# EAGLE board projeson (EAGLE 6.3)

Size 100 x 80 mm. Coordinates in mm from the lower left corner, seen from the top.
Outline: 0,0 100,0 100,80 0,80 0,0
Copper layers (1*16): Top 0.035mm / dielectric 1.5mm / Bottom 0.035mm
Design rules "default": minimum track width 10mil, minimum drill 24mil, track to track 8mil, track to pad 8mil, pad to pad 8mil, via to via 8mil, smd to smd 8mil, copper to edge 40mil, drill to drill 8mil, minimum pad ring 10mil, minimum via ring 8mil, stop-mask expansion 4mil, vias tented up to drill 0mil, thermal gap 10mil

## Footprints (pad centres in the part's own frame; a part is rotated, then mirrored left to right if it is on the bottom)
78XXS = drill 1.016 pad 1.93 square: GND 0,-5.08; IN -2.54,-2.54; OUT 2.54,-2.54
RB1A = drill 1.016 pad 1.676 square: + -2.54,2.54; - 2.54,-2.54; AC1 2.54,2.54; AC2 -2.54,-2.54
E3,5-10 = drill 0.813 pad 1.676 square: + -1.778,0; - 1.778,0
E2,5-7 = drill 0.813 pad 1.6 square: + -1.27,0; - 1.27,0
C050-025X075 = drill 0.813 square: 1 -2.54,0; 2 2.54,0
DIL28-3 = drill 0.813 long: 1 -16.51,-3.81; 2 -13.97,-3.81; 3 -11.43,-3.81; 4 -8.89,-3.81; 5 -6.35,-3.81; 6 -3.81,-3.81; 7 -1.27,-3.81; 8 1.27,-3.81; 9 3.81,-3.81; 10 6.35,-3.81; 11 8.89,-3.81; 12 11.43,-3.81; 13 13.97,-3.81; 14 16.51,-3.81; 15 16.51,3.81; 16 13.97,3.81; 17 11.43,3.81; 18 8.89,3.81; 19 6.35,3.81; 20 3.81,3.81; 21 1.27,3.81; 22 -1.27,3.81; 23 -3.81,3.81; 24 -6.35,3.81; 25 -8.89,3.81; 26 -11.43,3.81; 27 -13.97,3.81; 28 -16.51,3.81
317L = drill 0.813 pad 1.422 square: 1 -1.27,0; 2 0,1.905; 3 1.27,0
1X08 = drill 1.016 long: 1 -8.89,0; 2 -6.35,0; 3 -3.81,0; 4 -1.27,0; 5 1.27,0; 6 3.81,0; 7 6.35,0; 8 8.89,0
HY-1602F = drill 1 pad 1.93 long: 1 2.54,0; 2 5.08,0; 3 7.62,0; 4 10.16,0; 5 12.7,0; 6 15.24,0; 7 17.78,0; 8 20.32,0; 9 22.86,0; 10 25.4,0; 11 27.94,0; 12 30.48,0; 13 33.02,0; 14 35.56,0; 15 38.1,0; 16 40.64,0 | hole 2.5: -2.96,0; 72.04,0; -2.96,-31; 72.04,-31
AC04 = drill 1.1 pad 2: 1 -12.7,0; 2 12.7,0
0207/10 = drill 0.813 pad 1.422 square: 1 -5.08,0; 2 5.08,0
E3031TRF = drill 1.016 pad 2.54 square: P$1 -10,-10; P$5 10,-10; P$7 5,10; P$9 -5,10
UTR-C12-M = drill 1.016 pad 1.676 square: 1 -17.188,4.333; 2 -17.188,1.796; 3 -17.188,-0.739; 4 20.912,9.421; 5 20.912,6.878; 6 20.912,4.341; 7 20.912,1.801; 8 20.912,-0.742; 9 20.912,-3.282; 10 20.912,-5.817; 11 20.916,-8.358
RG58_RF_CON = drill 1.676 pad 3.048 square: GND 0,7.62; RF 0,3.81 | hole 2.997: -2.54,0; 2.54,0
AK300/3 = drill 1.321 long: 1 -5.004,0; 2 0,0; 3 5.004,0

## Placement (x,y rotation side)
7805  [78XXS]  -74.93,106.68 0 top  (outside the outline)
B1  RB156 KOpru Diyot  [RB1A]  -100.33,76.2 0 top  (outside the outline)
C2  470UF 35V  [E3,5-10]  -81.28,76.2 0 top  (outside the outline)
C3  22uf 16V  [E2,5-7]  -91.44,104.14 0 top  (outside the outline)
C4  100n  [C050-025X075]  -16.51,111.76 0 top  (outside the outline)
C9  10uf 35V  [E2,5-7]  -106.68,104.14 0 top  (outside the outline)
C10  220n  [C050-025X075]  -25.4,111.76 0 top  (outside the outline)
C16  100n  [C050-025X075]  -34.29,111.76 0 top  (outside the outline)
IC1  PIC16876P  [DIL28-3]  -31.75,76.2 0 top  (outside the outline)
IC2  LM317L  [317L]  -71.12,110.49 0 top  (outside the outline)
JP1  [1X08]  -49.53,110.49 0 top  (outside the outline)
LCD1  LCD_2X16_SIL  [HY-1602F]  -88.9,35.56 0 top  (outside the outline)
R1  220  [AC04]  -26.67,85.09 0 top  (outside the outline)
R2  220  [AC04]  -54.61,85.09 0 top  (outside the outline)
R3  220  [AC04]  -82.55,85.09 0 top  (outside the outline)
R4  220  [AC04]  -26.67,93.98 0 top  (outside the outline)
R5  220  [AC04]  -54.61,93.98 0 top  (outside the outline)
R6  220  [AC04]  -82.55,93.98 0 top  (outside the outline)
R7  220  [AC04]  -26.67,102.87 0 top  (outside the outline)
R8  220  [AC04]  -54.61,102.87 0 top  (outside the outline)
R9  470R  [0207/10]  -80.01,110.49 0 top  (outside the outline)
R10  330R  [0207/10]  -92.71,110.49 0 top  (outside the outline)
TRAFO  12V  [E3031TRF]  -72.39,54.61 0 top  (outside the outline)
U$1  UTR-C12-M  [UTR-C12-M]  -36.83,54.61 0 top  (outside the outline)
U$2  RG58_RF_CON  [RG58_RF_CON]  -69.85,72.39 0 top  (outside the outline)
X1  [AK300/3]  -97.79,46.99 0 top  (outside the outline)

## Library data of the parts
7805 IC2 = v-reg
B1 = rectifier
C2-C4 C9 C10 C16 R9 R10 = rcl
IC1 = microchip; OC_FARNELL: unknown; OC_NEWARK: unknown
JP1 = pinhead
LCD1 = lcd_2x16_led_backlight
R1-R8 = resistor-power; OC_FARNELL: unknown; OC_NEWARK: unknown
TRAFO = UDEA3
U$1 U$2 = UDEA_HAKKI
X1 = con-ptr500; OC_FARNELL: unknown; OC_NEWARK: unknown

## Nets
GND: 7805.GND B1.- C2.- C3.- C4.2 C16.2 IC1.8 IC1.19 U$1.3 U$1.4
N$1: R1.1
N$2: R2.1
N$3: R3.1 U$1.9
N$4: U$1.10
N$5: R1.2
N$9: IC1.28 LCD1.4
N$10: R5.2
N$11: R6.2
N$12: IC1.11 R7.2
N$13: R8.2
N$14: IC1.13
N$17: IC1.16
N$18: IC1.27 LCD1.5
N$19: IC1.26 LCD1.6
N$20: IC1.25 LCD1.11
N$21: IC1.24 LCD1.12
N$22: IC1.23 LCD1.13
N$23: IC1.22 LCD1.14
N$24: TRAFO.P$5 X1.2
N$25: B1.AC1 TRAFO.P$7
N$26: B1.AC2 TRAFO.P$9
N$27: 7805.IN B1.+ C2.+ C16.1
N$28: TRAFO.P$1 X1.1
N$29: IC2.1 R9.2 R10.1
N$30: 7805.OUT C3.+ C4.1 IC2.3 R5.1 R6.1 R7.1 R8.1
N$31: U$1.2 U$2.RF
N$38: C9.+ C10.1 IC2.2 R10.2 U$1.11
N$39: C9.- C10.2 R9.1
VCC: LCD1.2
VDD: IC1.20
VSS: LCD1.1

## Tracks (layer width: path | path; a pad name or v marks a point on that pad's centre or on a via)
GND  (9 unrouted)
N$3  (1 unrouted)
N$9  (1 unrouted)
N$12  (1 unrouted)
N$18  (1 unrouted)
N$19  (1 unrouted)
N$20  (1 unrouted)
N$21  (1 unrouted)
N$22  (1 unrouted)
N$23  (1 unrouted)
N$24  (1 unrouted)
N$25  (1 unrouted)
N$26  (1 unrouted)
N$27  (3 unrouted)
N$28  (1 unrouted)
N$29  (2 unrouted)
N$30  (7 unrouted)
N$31  (1 unrouted)
N$38  (4 unrouted)
N$39  (2 unrouted)